# EAGLE board DebugCAN (EAGLE 9.6.2)
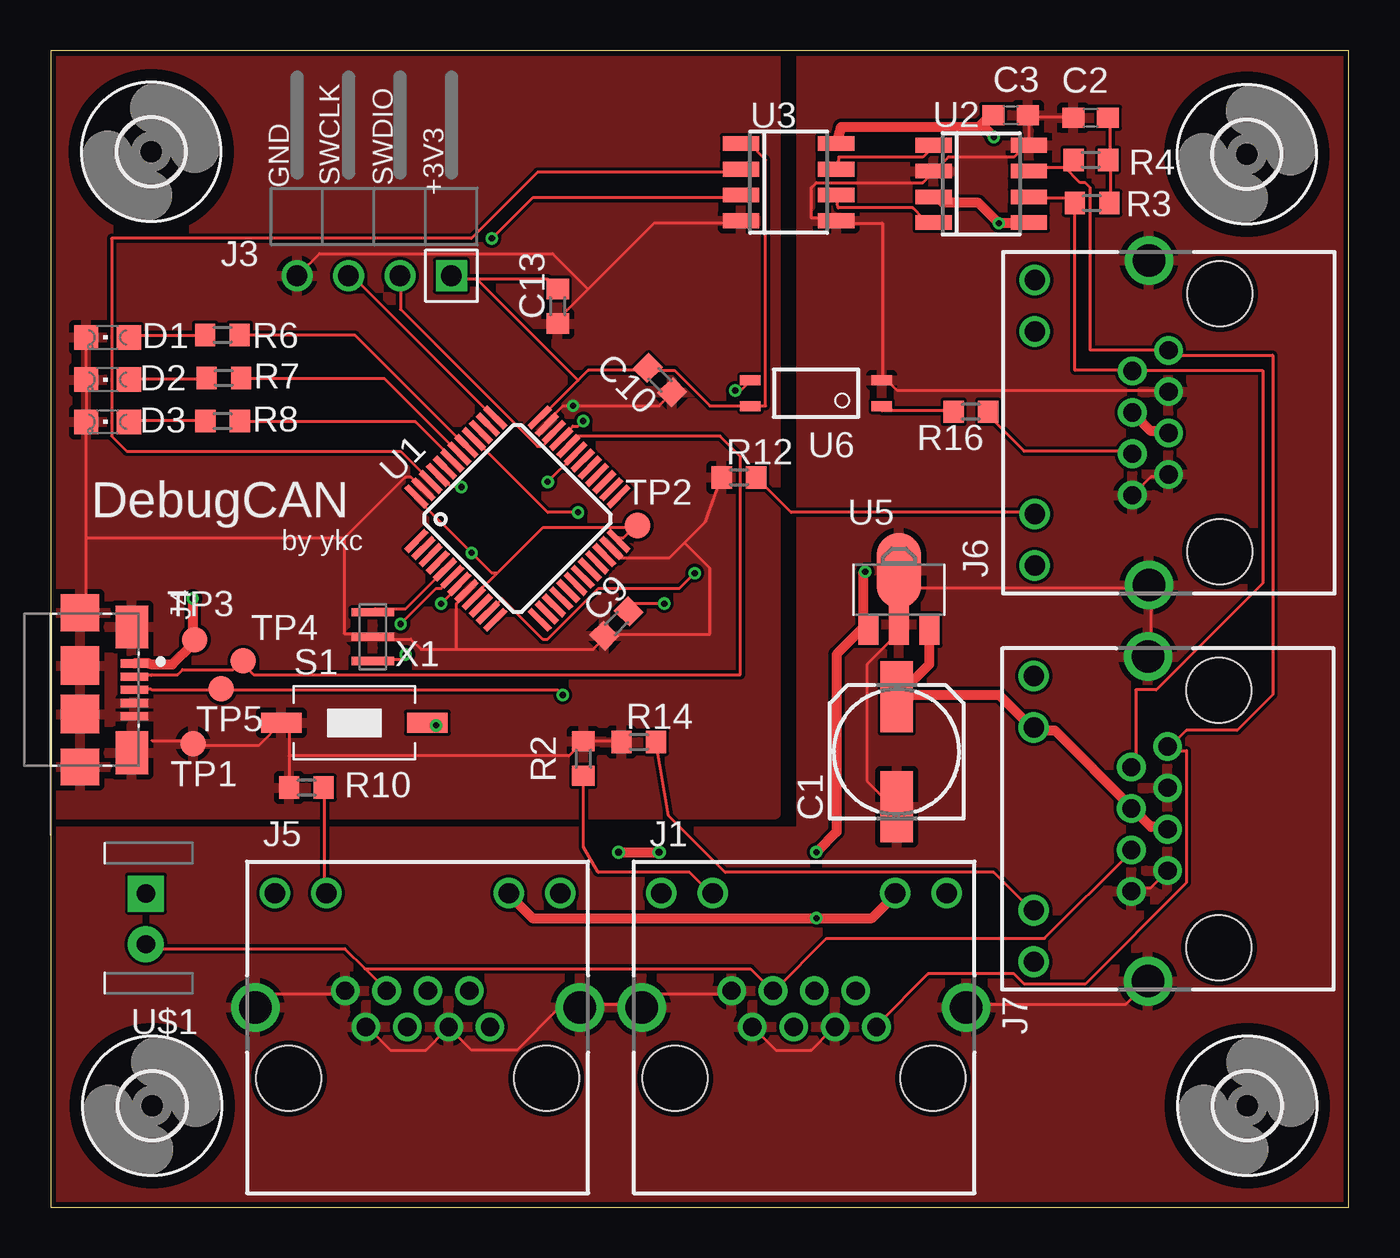
[diagram p0: board, top side]
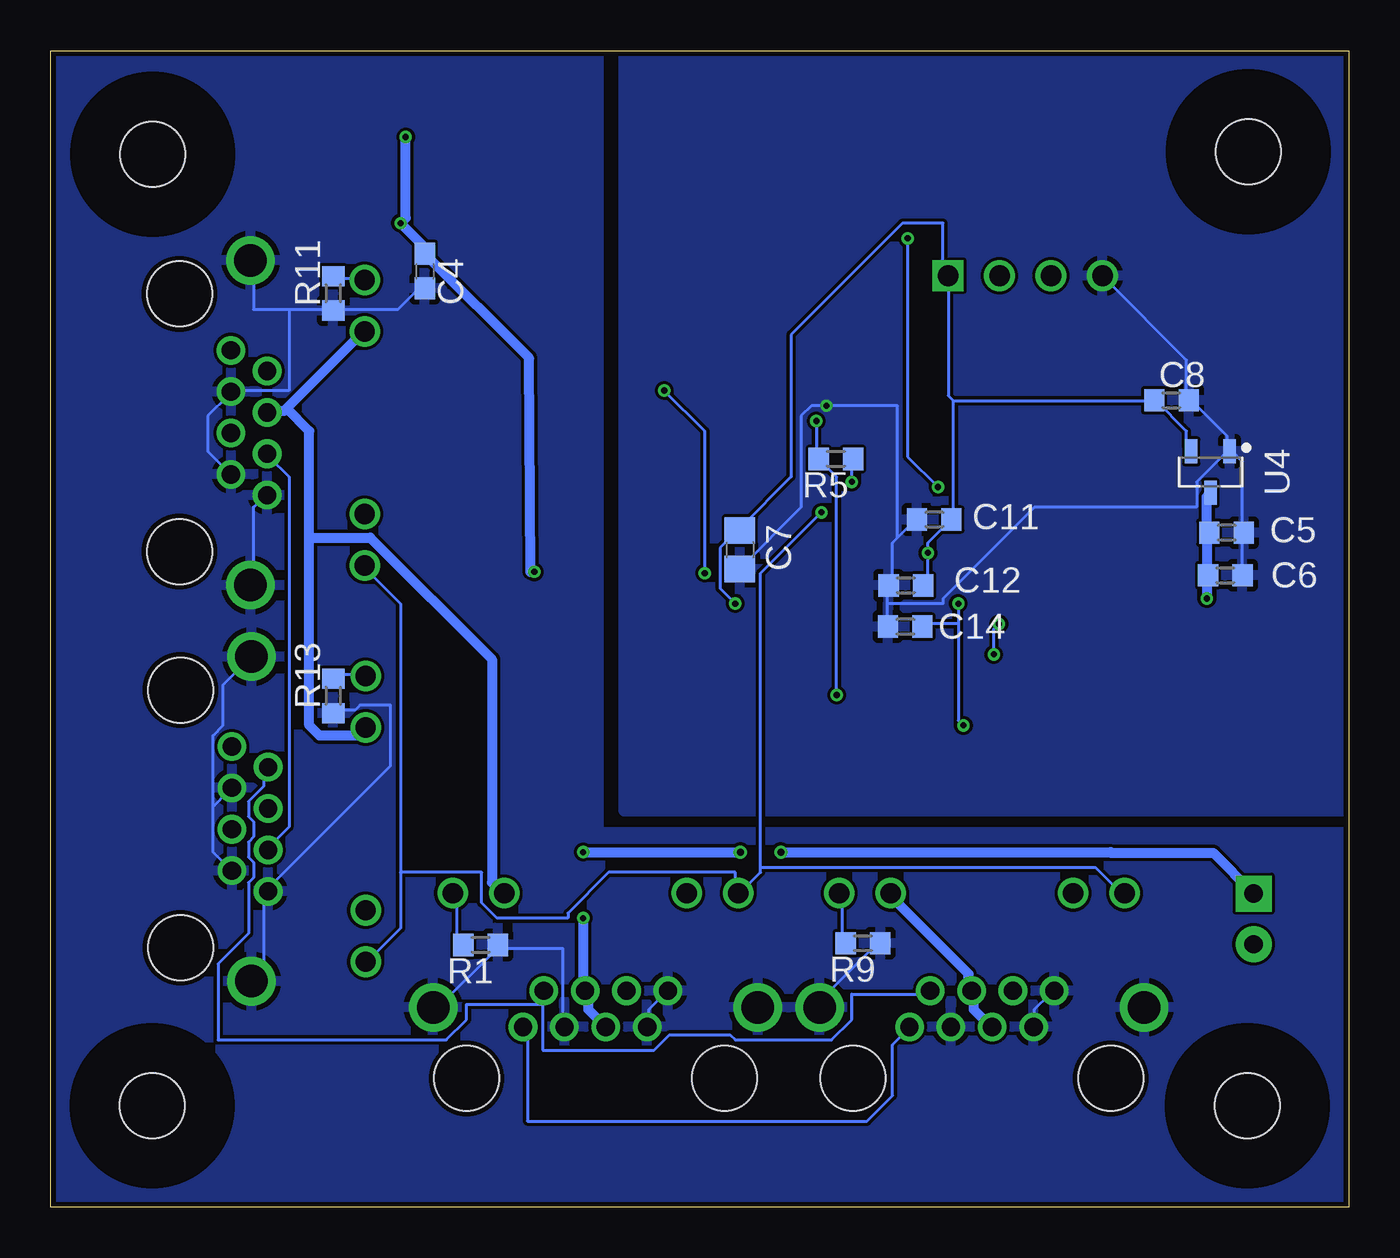
[diagram p1: board, bottom side, seen from below]

Size 64 x 57 mm. Coordinates in mm from the lower left corner, seen from the top.
Outline: 0,0 64,0 64,57 0,57 0,0
Copper layers (1*16): Top 0.035mm / dielectric 1.5mm / Bottom 0.035mm
Design rules "SeeedStudio_2layer_DRU_no_angle_20140221": minimum track width 6mil, minimum drill 12mil, track to track 6mil, track to pad 6mil, pad to pad 6mil, via to via 6mil, smd to smd 0mil, copper to edge 10mil, drill to drill 10mil, minimum pad ring 10mil, minimum via ring 6mil, stop-mask expansion 2mil, vias tented up to drill 100mil, thermal gap 10mil
Net classes: 1 wide: width 0.5 mm

## Footprints (pad centres in the part's own frame; a part is rotated, then mirrored left to right if it is on the bottom)
153CLV-0605 = smd 3.5 x 1.6: + 2.7,0; - -2.7,0
C0603 = smd 1.1 x 1: 1 -0.85,0; 2 0.85,0
C0603' = smd 1 x 1.1: 1 -0.85,0; 2 0.85,0
C0805 = smd 1.3 x 1.5: 1 -0.95,0; 2 0.95,0
CHIPLED_0805 = smd 1.2 x 1.2: A 0,-1.05; C 0,1.05
3,2 = hole 3.2: 0,0
8P8C-LED = drill 0.9 pad 1.3: 1 3.57,-3.81; 2 2.55,-2.03; 3 1.53,-3.81; 4 0.51,-2.03; 5 -0.51,-3.81; 6 -1.53,-2.03; 7 -2.55,-3.81; 8 -3.57,-2.03 | drill 1 pad 1.422: GA 4.5,2.78; GC 7.04,2.78; YA -7.04,2.78; YC -4.5,2.78 | drill 1.6 pad 2.184: M1 -8,-2.85; M2 8,-2.85 | hole 3.2: 6.35,-6.35; -6.35,-6.35
MA04-1 = drill 1.016 square: 1 3.81,0 | drill 1.016: 2 1.27,0; 3 -1.27,0; 4 -3.81,0
AMPHENOL_10118192-0001LF = smd 0.4 x 1.35: 1 -1.3,0; 2 -0.65,0; 3 0,0; 4 0.65,0; 5 1.3,0 | smd 2.1 x 1.6: SH1 -3.1,-0.125; SH2 3.1,-0.125 | smd 1.8 x 1.9: SH3 -3.8,-2.675; SH6 3.8,-2.675 | smd 1.9 x 1.9: SH4 -1.2,-2.675; SH5 1.2,-2.675
R0603 = smd 1 x 1.1: 1 -0.85,0; 2 0.85,0
SWITCH_TACTILE_3X6 = smd 2 x 1: P$1 -3.6,0; P$2 3.6,0
B1,27 = smd 1.27 x 1.27: TP 0,0
LQFP48 = smd 1.4 x 0.3: 1 -4.3,2.75; 2 -4.3,2.25; 3 -4.3,1.75; 4 -4.3,1.25; 5 -4.3,0.75; 6 -4.3,0.25; 7 -4.3,-0.25; 8 -4.3,-0.75; 9 -4.3,-1.25; 10 -4.3,-1.75; 11 -4.3,-2.25; 12 -4.3,-2.75; 25 4.3,-2.75; 26 4.3,-2.25; 27 4.3,-1.75; 28 4.3,-1.25; 29 4.3,-0.75; 30 4.3,-0.25; 31 4.3,0.25; 32 4.3,0.75; 33 4.3,1.25; 34 4.3,1.75; 35 4.3,2.25; 36 4.3,2.75 | smd 0.3 x 1.4: 13 -2.75,-4.3; 14 -2.25,-4.3; 15 -1.75,-4.3; 16 -1.25,-4.3; 17 -0.75,-4.3; 18 -0.25,-4.3; 19 0.25,-4.3; 20 0.75,-4.3; 21 1.25,-4.3; 22 1.75,-4.3; 23 2.25,-4.3; 24 2.75,-4.3; 37 2.75,4.3; 38 2.25,4.3; 39 1.75,4.3; 40 1.25,4.3; 41 0.75,4.3; 42 0.25,4.3; 43 -0.25,4.3; 44 -0.75,4.3; 45 -1.25,4.3; 46 -1.75,4.3; 47 -2.25,4.3; 48 -2.75,4.3
SO08 = smd 0.72 x 1.78: 1 -1.905,-2.35; 2 -0.635,-2.35; 3 0.635,-2.35; 4 1.905,-2.35; 5 1.905,2.35; 6 0.635,2.35; 7 -0.635,2.35; 8 -1.905,2.35
SOT95P240X110-3 = smd 1.18 x 0.609: 1 -1.024,0.95; 2 -1.024,-0.95; 3 1.024,0
SOT89 = smd 1 x 1.5: 1 -1.499,-1.981; 3 1.499,-1.981 | smd 1 x 2: 2 0,-1.727 | smd 2.2 x 3.7: 2@1 0,0.94
MINI-FLAT-4 = smd 1 x 0.5: 1 -3.24,0.635; 2 -3.24,-0.635; 3 3.24,-0.635; 4 3.24,0.635
CON-XH-2-STRAIGHT = drill 0.9 pad 1.778 square: P$1 1.21,-0.73 | drill 0.9 pad 1.778: P$2 -1.29,-0.73
CSTCE8M00G55 = smd 0.4 x 2.1: 1 -1.2,0; 2 0,0; 3 1.2,0

## Placement (x,y rotation side)
C1  EEEHA1E220P  [153CLV-0605]  41.71,22.45 90 top
C2  [C0603]  51.27,53.7 180 top
C3  [C0603]  47.33,53.82 0 top
C4  [C0603]  45.55,46.14 270 bottom
C5  1u  [C0603']  6.03,33.24 0 bottom
C6  100n  [C0603']  6.09,31.14 0 bottom
C7  4u7  [C0805]  30.02,32.4 270 bottom
C8  100n  [C0603']  8.74,39.77 0 bottom
C9  100n  [C0603']  27.89,28.77 45 top
C10  100n  [C0603']  30.04,40.77 135 top
C11  100n  [C0603']  20.44,33.9 0 bottom
C12  100n  [C0603']  21.84,30.64 0 bottom
C13  100n  [C0603']  25,44.41 90 top
C14  100n  [C0603']  21.87,28.62 0 bottom
D1  [CHIPLED_0805]  2.8,42.87 90 top
D2  [CHIPLED_0805]  2.8,40.79 90 top
D3  [CHIPLED_0805]  2.8,38.71 90 top
H1  MOUNT-HOLE3.2  [3,2]  58.97,51.9 0 top
H2  MOUNT-HOLE3.2  [3,2]  4.96,52.02 0 top
H3  MOUNT-HOLE3.2  [3,2]  5,5 0 top
H4  MOUNT-HOLE3.2  [3,2]  59,5 0 top
J1  8P8C-LED  [8P8C-LED]  37.14,12.7 0 top
J3  MA04-1  [MA04-1]  15.95,45.91 0 top
J4  10118192-0001LF  [AMPHENOL_10118192-0001LF]  4.12,25.5 270 top
J5  8P8C-LED  [8P8C-LED]  18.09,12.7 0 top
J6  8P8C-LED  [8P8C-LED]  51.3,38.66 90 top
J7  8P8C-LED  [8P8C-LED]  51.25,19.14 90 top
R1  [R0603]  42.8,12.93 180 bottom
R2  [R0603]  26.26,22.11 270 top
R3  60  [R0603]  51.34,49.49 0 top
R4  60  [R0603]  51.28,51.62 0 top
R5  1k5  [R0603]  25.29,36.88 180 bottom
R6  1k  [R0603]  8.47,42.99 180 top
R7  1k  [R0603]  8.54,40.87 180 top
R8  1k  [R0603]  8.47,38.74 180 top
R9  [R0603]  23.95,13.01 180 bottom
R10  [R0603]  12.61,20.68 0 top
R11  [R0603]  50.07,45.04 90 bottom
R12  [R0603]  33.93,35.97 0 top
R13  [R0603]  50.07,25.2 90 bottom
R14  [R0603]  29,22.93 0 top
R16  470  [R0603]  45.37,39.21 180 top
S1  SWITCH_TACTILETOP  [SWITCH_TACTILE_3X6]  14.97,23.88 0 top
TP1  TPB1,27  [B1,27]  7.02,22.85 0 top
TP2  TPB1,27  [B1,27]  28.94,33.6 0 top
TP3  TPB1,27  [B1,27]  7.11,27.98 0 top
TP4  TPB1,27  [B1,27]  9.49,26.93 0 top
TP5  TPB1,27  [B1,27]  8.41,25.55 0 top
U1  STM32F302C  [LQFP48]  23.01,33.94 45 top
U2  NCV7351D1E  [SO08]  45.88,50.44 270 top
U3  SI8621AB-B-IS  [SO08]  36.38,50.52 270 top
U4  AP2127N-3.3TRG1  [SOT95P240X110-3]  6.82,36.23 270 bottom
U5  78L05F  [SOT89]  41.82,30.45 0 top
U6  TLP291  [MINI-FLAT-4]  37.73,40.12 180 top
U$1  XH-2-STRAIGHT  [CON-XH-2-STRAIGHT]  3.96,14.25 90 top
X1  CSTCE8M00G55  [CSTCE8M00G55]  15.88,28.12 270 top

## Library data of the parts
C1-C4 = rcl; SPICEPREFIX: C
C5-C14 R5-R8 = rcl
D1-D3 = led
H1-H4 = holes
J1 J5-J7 = con-rj45; OC_FARNELL: unknown; OC_NEWARK: unknown
J3 = con-headers
J4 = con-usb; DESCRIPTION: USB - micro B USB 2.0 Receptacle Connector 5 Position Surface Mount, Right Angle; DIGI-KEY_PART_NUMBER: 609-4613-1-ND; DIGI-KEY_PURCHASE_URL: https://www.digikey.com/product-detail/en/amphenol-icc-fci/10118192-0001LF/609-4613-1-ND/2785378?utm_source=snapeda&utm_medium=aggregator&utm_campaign=symbol; MF: Amphenol ICC; MP: 10118192-0001LF; PACKAGE: None
R1-R4 R9-R14 R16 = rcl; SPICEPREFIX: R
S1 = switch-tactile
TP1-TP5 = testpad
U1 = stm32_mcu
U2 = on-semi
U3 = silabs
U4 = torex
U5 = linear
U6 = toshiba; OC_FARNELL: unknown; OC_NEWARK: unknown
U$1 = con-xh
X1 = resonator

## Nets
!EMS: U1.11 U6.3
!RESET: C14.2 S1.P$2 U1.7
+3V3: C7.1 C8.1 C9.2 C10.2 C11.2 C12.2 C13.2 J3.1 TP2.TP U1.9 U1.24 U1.36 U1.48 U3.1 U4.2 U6.4
+5V [wide]: C5.1 C6.1 J4.1 TP3.TP U4.3
+5V_ISO [wide]: C3.1 C4.1 U2.3 U2.5 U3.8 U5.1 U$1.P$1
+12V [wide]: C1.+ J1.4 J1.5 J1.GA J5.4 J5.5 J5.GA J6.4 J6.5 J6.GA J7.4 J7.5 J7.GA U5.3
CAN_LED: J1.YA J5.YA J6.YA J7.YA U1.40
CANH: J1.1 J5.1 J6.1 J7.1 R4.1 U2.7
CANL: J1.2 J5.2 J6.2 J7.2 R3.1 U2.6
CANRX: U1.45 U3.3
CANRX_ISO: U2.4 U3.6
CANTX: U1.46 U3.2
CANTX_ISO: U2.1 U3.7
EMS: J1.6 J5.6 J6.6 J7.6 R16.1 U$1.P$2
GNDA: C5.2 C6.2 C7.2 C8.2 C9.1 C10.1 C11.1 C12.1 C13.1 C14.1 D1.C D2.C D3.C J3.4 J4.4 J4.5 J4.SH1 J4.SH2 J4.SH3 J4.SH4 J4.SH5 J4.SH6 R2.1 R10.1 R12.1 R14.1 S1.P$1 TP1.TP U1.8 U1.23 U1.35 U1.47 U3.4 U4.1 X1.2
GNDIO: C1.- C2.2 C3.2 C4.2 J1.3 J1.7 J1.8 J1.M1 J1.M2 J5.3 J5.7 J5.8 J5.M1 J5.M2 J6.3 J6.7 J6.8 J6.M1 J6.M2 J7.3 J7.7 J7.8 J7.M1 J7.M2 R1.1 R9.1 R11.1 R13.1 U2.2 U2.8 U3.5 U5.2 U5.2@1 U6.2
LED0: R6.1 U1.41
LED1: R7.1 U1.42
LED2: R8.1 U1.43
N$2: D2.A R7.2
N$3: J1.GC R1.2
N$4: J1.YC R2.2
N$5: D1.A R6.2
N$6: C2.1 R3.2 R4.2
N$7: U1.6 X1.3
N$8: U1.5 X1.1
N$9: J5.GC R9.2
N$10: J5.YC R10.2
N$11: R5.1 U1.31
N$12: J6.GC R11.2
N$13: J6.YC R12.2
N$14: J7.GC R13.2
N$15: J7.YC R14.2
N$21: D3.A R8.2
N$25: R16.2 U6.1
SWCLK: J3.3 U1.37
SWDIO: J3.2 U1.34
USB_DM: J4.2 TP4.TP U1.32
USB_DP: J4.3 R5.2 TP5.TP U1.33

## Tracks (layer width: path | path; a pad name or v marks a point on that pad's centre or on a via)
!EMS  (via drill 0.3)
  Top 0.152: v33.75,40.25 34,40.25 U6.3 | v31.75,31.25 31,30.5 27,30.5 24.5,28 24.25,28 22.25,30 21.75,29.5 U1.11
  Bottom 0.152: v33.75,40.25 31.75,38.25 v31.75,31.25
!RESET  (via drill 0.3)
  Top 0.152: v19.25,29.75 20,30.5 U1.7 | v19,23.75 18.88,23.88 S1.P$2
  Bottom 0.152: 19.25,28.75 21,28.75 C14.2 | v19.25,29.75 19.25,28.75 | v19,23.75 19.25,24 19.25,28.75
+3V3  (via drill 0.3)
  Top 0.152: 28.75,33.5 28.25,33 28,33 U1.24 | 22,31.25 24.25,33.5 28.75,33.5 | 22,31.25 21,30.25 U1.9 | 28.75,33.5 TP2.TP | 22,31.25 21.75,31.25 v20.75,32.25 18,35 U1.48 | 26,40.75 26.5,41.25 29.25,41.25 C10.2 29.5,41.25 30.75,41.25 32.5,39.5 34.25,39.5 U6.4 34.5,39.5 35.25,39.5 35.25,51.62 34.45,52.43 U3.1 | 26,40.75 24.25,39 U1.36 | v30.25,29.75 28.75,29.75 28.5,29.5 C9.2 | C13.2 24.5,45.75 21,45.75 | 21,45.75 20,45.75 J3.1 | 21,45.75 26,40.75
  Bottom 0.152: U4.2 8,37.5 8,38.25 9.5,39.75 C8.1 9.75,39.75 19.5,39.75 | C12.2 20.75,30.75 v20.75,32.25 20.75,32.75 19.75,33.75 C11.2 19.5,34 19.5,39.75 | v30.25,29.75 31,30.5 31,32.5 30.25,33.25 C7.1 30,33.5 27.5,36 27.5,43 22,48.5 20,48.5 20,46 J3.1 19.75,45.75 19.75,40 19.5,39.75
+5V  (via drill 0.3)
  Top 0.5: v7,30 7,28 TP3.TP 7,27.75 6,26.75 5,26.75 4.8,26.82 4.19,26.82 J4.1
  Bottom 0.5: U4.3 7,35 7,33.25 C5.1 7,33 7,31.25 C6.1 7,31 v7,30
+5V_ISO  (via drill 0.3, 0.35)
  Top 0.5: U2.5 48,48.5 v46.75,48.5 45.75,49.5 44,49.5 43.75,49.75 U2.3 | 45.88,53.38 45.75,53.25 38.96,53.25 U3.8 | 45.88,53.38 46.25,53.75 C3.1 | v37.75,17.5 38.75,18.5 38.75,27.25 40,28.5 U5.1 40.08,28.73 40.08,31.32 v40.16,31.32 | 45.88,53.38 v46.5,52.75 | v28,17.5 v30,17.5
  Bottom 0.5: v37.75,17.5 v30,17.5 | v28,17.5 11.75,17.5 11.71,17.46 6.69,17.46 U$1.P$1 | v46.5,52.75 46.5,48.75 v46.75,48.5 45.55,47.3 C4.1 40.42,41.86 40.42,41.8 40.34,31.32 v40.16,31.32
+12V  (via drill 0.3)
  Top 0.5: J1.GA 41.5,15.25 40.5,14.25 v37.75,14.25 23.75,14.25 22.75,15.25 J5.GA | J6.4 53.5,39 54.25,38.25 55,38.25 J6.5 | J7.5 55,18.75 54.25,18.75 53.5,19.5 J7.4 53.25,19.75 49.5,23.5 48.5,23.5 J7.GA 48.25,23.75 46.75,25.25 41.75,25.25 C1.+ 43.32,26.76 U5.3
  Bottom 0.5: J1.5 36.75,9 37.5,9.75 37.5,10.5 J1.4 37.75,10.75 v37.75,14.25 | J5.5 17.75,9 18.5,9.75 18.5,10.5 J5.4 18.75,10.75 18.75,11.5 22.5,15.25 J5.GA | 52.38,39.38 52.5,39.25 53.25,39.25 J6.4 | 52.38,39.38 48.75,43 J6.GA | 52.38,39.38 51.25,38.25 51.25,33 | 51.25,33 51.25,23.75 50.75,23.25 48.5,23.25 48.5,23.5 J7.GA | 51.25,33 48.25,33 42.25,27 42.25,16 41.75,15.5 J1.GA
CAN_LED  (via drill 0.3)
  Top 0.152: v26,34.25 24.5,34.25 21,37.75 U1.40
  Bottom 0.152: 46.75,16.5 46.75,29.75 48.5,31.5 J6.YA | 46.75,16.5 46.75,13.75 48.25,12.25 J7.YA | v26,34.25 29,31.25 29,16.75 | 29,16.75 29,16.5 30,15.5 J1.YA 30.25,15.5 30.25,16.5 36.5,16.5 38.5,14.5 38.5,14.25 42,14.25 42.75,15 42.75,16.5 46.75,16.5 | 29,16.75 12.5,16.75 11.25,15.5 J5.YA
CANH
  Top 0.152: 50,51.25 50.25,51.5 R4.1 50,51.25 | 50,51.25 48.25,51.25 U2.7 | 50,51.25 50.75,50.5 51,50.5 51.25,50.25 51.25,42.25 55,42.25 J6.1 55.25,42 60.25,42 60.25,25.25 58.5,23.5 56,23.5 55.25,22.75 J7.1 55.25,22.5 56,22.5 56,16 51,11 48,11 47.5,11.5 43.25,11.5 40.75,9 J1.1
  Bottom 0.152: J5.1 21.75,8.75 22.5,8 22.5,5.5 23.75,4.25 40.5,4.25 40.5,8.75 J1.1
CANL
  Top 0.152: U2.6 48.25,49.75 50,49.75 50.25,49.5 R3.1 50.5,49.25 50.5,41.25 53.25,41.25 J6.2 53.5,41.25 59.75,41.25 59.75,30.75 54.5,25.5 53.5,25.5 53.5,21.75 J7.2
  Bottom 0.152: 39.75,10 39.75,10.5 J1.2 39.75,10 | 39.75,10 39.75,7.75 34.25,7.75 33.5,8.5 30.5,8.5 30.25,8.25 25.5,8.25 24.5,9.25 24.5,10.5 20.75,10.5 J5.2 | 39.75,10 43.5,10 43.5,9.25 44.5,8.25 55.75,8.25 55.75,12 54.25,13.5 54.25,16 54,16.25 54,17 54.25,17.25 54.25,18 54,18.25 54,19 54.25,19.25 54.25,20 53.5,20.75 53.5,21.5 J7.2
CANRX  (via drill 0.3)
  Top 0.152: v20.25,35.5 19.75,35.5 19.25,36 U1.45 | v21.75,47.75 23.75,49.75 34,49.75 U3.3
  Bottom 0.152: v20.25,35.5 21.75,37 v21.75,47.75
CANRX_ISO
  Top 0.152: U3.6 38.82,49.25 42.5,49.25 43,48.75 43.5,48.75 U2.4
CANTX
  Top 0.152: U1.46 18.75,35.75 17.25,37.25 3.75,37.25 3,38 3,47.75 20.75,47.75 24,51 34,51 U3.2
CANTX_ISO
  Top 0.152: U3.7 38.86,51.75 43,51.75 43.5,52.25 U2.1
EMS
  Top 0.152: R16.1 46.25,39 48,37.25 53.25,37.25 J6.6 | 15.5,11.75 14.5,12.75 4.75,12.75 U$1.P$2 | 15.5,11.75 16.5,10.75 J5.6 | 15.5,11.75 34.5,11.75 35.5,10.75 J1.6 35.75,10.75 38.25,13.25 49,13.25 53.25,17.5 J7.6
  Bottom 0.152: J7.6 53.25,17.75 52.25,18.75 52.25,36 53.25,37 J6.6
GNDA  (via drill 0.3)
  Top 0.152: C10.1 30.5,40 30,39.5 v25.75,39.5 25.25,39.5 24.5,38.75 U1.35 | 26.5,45.25 29.75,48.5 34,48.5 U3.4 | 26.5,45.25 25,43.75 C13.1 | 26.5,45.25 24.75,47 13.25,47 12.25,46 J3.4 | 31.25,32.75 30.5,32 28,32 27.75,32.25 U1.23 | 31.25,32.75 32.29,33.79 R12.1 | 20,27.5 18.25,27.5 17.75,28 16,28 X1.2 15.75,28.25 14.5,28.25 14.5,33 | 20,27.5 26.75,27.5 27.25,28 C9.1 27.5,28.25 32.5,28.25 32.5,31.5 31.25,32.75 | 14.5,33 17.5,36 17.75,36 18.25,35.5 U1.47 | 20,27.5 20,29.75 20.25,30 20.25,30.25 U1.8 | R14.1 28.11,22.96 R2.1 25.55,22.25 11.75,22.25 | 11.75,22.25 11.75,23.88 S1.P$1 10.24,22.75 7.25,22.75 TP1.TP 7,23 5,23 | D1.C D2.C D3.C 1.75,33 | 1.75,29 1.75,33 | 1.75,33 14.5,33 | 11.75,22.25 11.76,22.24 R10.1
  Bottom 0.152: 22.75,29.75 22.75,28.75 C14.1 | 22.75,29.75 22.75,30.5 C12.1 22.5,30.75 22.5,32.75 22.25,33 | 22.25,33 21.5,33.75 C11.1 | 22.25,33 22.25,39.5 v25.75,39.5 26.5,39.5 27,39 27,34.5 30,31.5 C7.2 | U4.1 6,37.5 6,38 7.75,39.75 C8.2 8,40 8,41.75 12,45.75 J3.4 | 5,31 C6.2 5.25,31.25 5.25,33 C5.2 5.25,33.25 5.25,36.75 5.75,37.25 U4.1 | 22.75,29.75 20,29.75 20,30 15.5,34.5 7.5,34.5 7.5,35.75 6,37.25 U4.1
  pour Top: 0,57 0,19.38 35.75,19.38 35.75,57
  pour Bottom: 0,57 0,19.5 35.75,19.5 35.75,57
GNDIO
  Top 0.152: 48.25,53.75 48.25,52.5 U2.8 48,52.25 47.5,51.75 44.25,51.75 43.75,51.25 U2.2 43.5,51 43,50.5 37.75,50.5 37.5,50.25 37.5,48.75 38.5,48.75 U3.5 38.75,48.5 41,48.5 41,40.78 U6.2 41.31,40.69 41.75,40.25 55,40.25 J6.3 | 48.25,53.75 50.25,53.75 C2.2 | 48.25,53.75 C3.2 | 42,30.5 42,31.25 U5.2@1 42,30.5 | 42,30.5 42,28.75 U5.2 42,28.5 40.25,26.75 40.25,21 41.5,19.75 C1.- | J6.8 53.5,35.25 54.25,36 55,36 J6.7 | J7.M2 54.25,27.25 54.25,30.5 J6.M1 54,30.5 42,30.5 | J7.7 55,16.5 54.25,15.75 53.5,15.75 J7.8 | J5.7 15.75,8.75 16.75,7.75 18.5,7.75 19.5,8.75 J5.3 19.75,8.75 20.75,7.75 23,7.75 25,9.75 26,9.75 J5.M2 26.25,10 29,10 J1.M1 29.25,10 29.75,10.5 33.5,10.5 J1.8 | J5.M1 10.25,10 10.75,10.5 14.5,10.5 J5.8 | J1.3 38.5,8.75 37.5,7.75 35.75,7.75 34.75,8.75 J1.7 | J7.M1 54,11 53,10 45.25,10 J1.M2
  Bottom 0.152: J6.8 53.5,35 54,34.5 54,30.75 J6.M1 | 52.25,44.25 54,44.25 54,46.5 J6.M2 | 52.25,44.25 50.25,44.25 R11.1 50,44.25 46.88,44.25 45.84,45.29 C4.2 | 52.25,44.25 52.25,40.25 55,40.25 J6.3 55.25,40 56.25,39 56.25,37.25 55.25,36.25 J6.7 | R13.1 50,24.5 49,24.5 48.75,24.75 47.25,24.75 47.25,21.75 53.25,15.75 J7.8 53.5,15.5 53.5,11.75 54,11.25 J7.M1 | 56,19.75 55.25,20.5 J7.3 | 56,19.75 56,17.5 55.25,16.75 J7.7 | J5.8 14.75,10.5 15.5,9.75 15.5,9 J5.7 | R9.1 23.25,13 26,10.25 26,10 J5.M2 | J1.M2 45,9.75 42,12.75 R1.1 41.75,12.75 38.75,12.75 38.75,9 J1.3 | J1.8 33.75,10.5 34.5,9.75 34.5,9 J1.7 | 56,19.75 56,23.25 55.5,23.75 55.5,25.75 54.25,27 J7.M2
  pour Top: 37,57 37,18.5 0,18.5 0,0 64,0 64,57
  pour Bottom: 0,18.5 0,0 64,0 64,57 37,57 37,18.5 36.75,18.5
LED0
  Top 0.152: R6.1 9.37,42.98 15.01,42.98 20.19,37.8 U1.41
LED1
  Top 0.152: R7.1 9.45,40.84 16.46,40.84 20.12,37.19 U1.42
LED2
  Top 0.152: R8.1 9.37,38.71 17.98,38.71 19.74,36.96 U1.43
N$2
  Top 0.152: R7.2 7.62,40.84 4.12,40.84 4.04,40.77 D2.A
N$3
  Bottom 0.152: R1.2 43.75,13 44,13.25 44,15.25 J1.GC
N$4
  Top 0.152: R2.2 26.26,17.75 26.99,16.5 31.5,16.5 32.5,15.5 J1.YC
N$5
  Top 0.152: R6.2 7.62,42.98 3.96,42.98 3.89,42.9 D1.A
N$6
  Top 0.152: R3.2 52.25,49.5 52.25,51.5 R4.2 52.25,51.75 52.25,53.5 C2.1
N$7  (via drill 0.3)
  Top 0.152: v17.25,28.75 19,30.5 19.25,30.5 19.75,31 U1.6 | v17.5,27.25 17.25,27 16,27 X1.3
  Bottom 0.152: v17.25,28.75 17.5,28.5 v17.5,27.25
N$8
  Top 0.152: U1.5 19.25,31.25 17.5,29.5 16,29.5 X1.1
N$9
  Bottom 0.152: R9.2 25,13.25 25,15.25 J5.GC
N$10
  Top 0.152: R10.2 13.5,20.5 13.5,15.5 J5.YC
N$11  (via drill 0.3)
  Top 0.152: v24.5,35.75 25.75,37 U1.31
  Bottom 0.152: v24.5,35.75 24.5,36.75 R5.1
N$12
  Bottom 0.152: R11.2 50,45.75 48.75,45.75 J6.GC
N$13
  Top 0.152: R12.2 36.5,34.25 48.5,34.25 J6.YC
N$14
  Bottom 0.152: R13.2 50,26.25 48.5,26.25 J7.GC
N$15
  Top 0.152: R14.2 30.45,19.3 33.25,16.5 46.5,16.5 48.25,14.75 J7.YC
N$21
  Top 0.152: R8.2 7.62,38.79 3.89,38.79 D3.A
N$25
  Top 0.152: U6.1 41,39.25 44.5,39.25 R16.2
SWCLK
  Top 0.152: U1.37 21.75,39 15,45.75 14.75,45.75 J3.3
SWDIO
  Top 0.152: U1.34 24.75,38 24.25,37.5 24,37.5 17.25,44.25 17.25,45.75 J3.2
USB_DM
  Top 0.152: U1.32 25.75,37.75 26,38 33,38 34,37 34,26.25 10,26.25 9.5,26.75 TP4.TP 9.25,26.75 9,26.5 6.5,26.5 6.25,26.25 5,26.25 4.95,26.21 4.19,26.21 J4.2
USB_DP  (via drill 0.3)
  Top 0.152: v26.25,38.75 26,38.5 25.75,38.5 25.25,38 U1.33 | v25.25,25.25 25,25.5 8.5,25.5 TP5.TP 8.25,25.5 5,25.5 4.95,25.53 4.19,25.53 J4.3
  Bottom 0.152: v26.25,38.75 26.25,37 R5.2 26,36.75 25.25,36 v25.25,25.25

## Text on the board
tPlace: GND | SWCLK | SWDIO | +3V3 | DebugCAN | by ykc